# Altium PCB EDP_PCB.PcbDoc
Units mm, origin at the board's own origin, x right, y up, seen from the top; angles counter-clockwise.
Board outline 73 x 93 mm, 2 copper layers (Top Layer, Bottom Layer), stack 1.2 mm thick; 25 components, 26 nets, 96 pads, 7 vias.
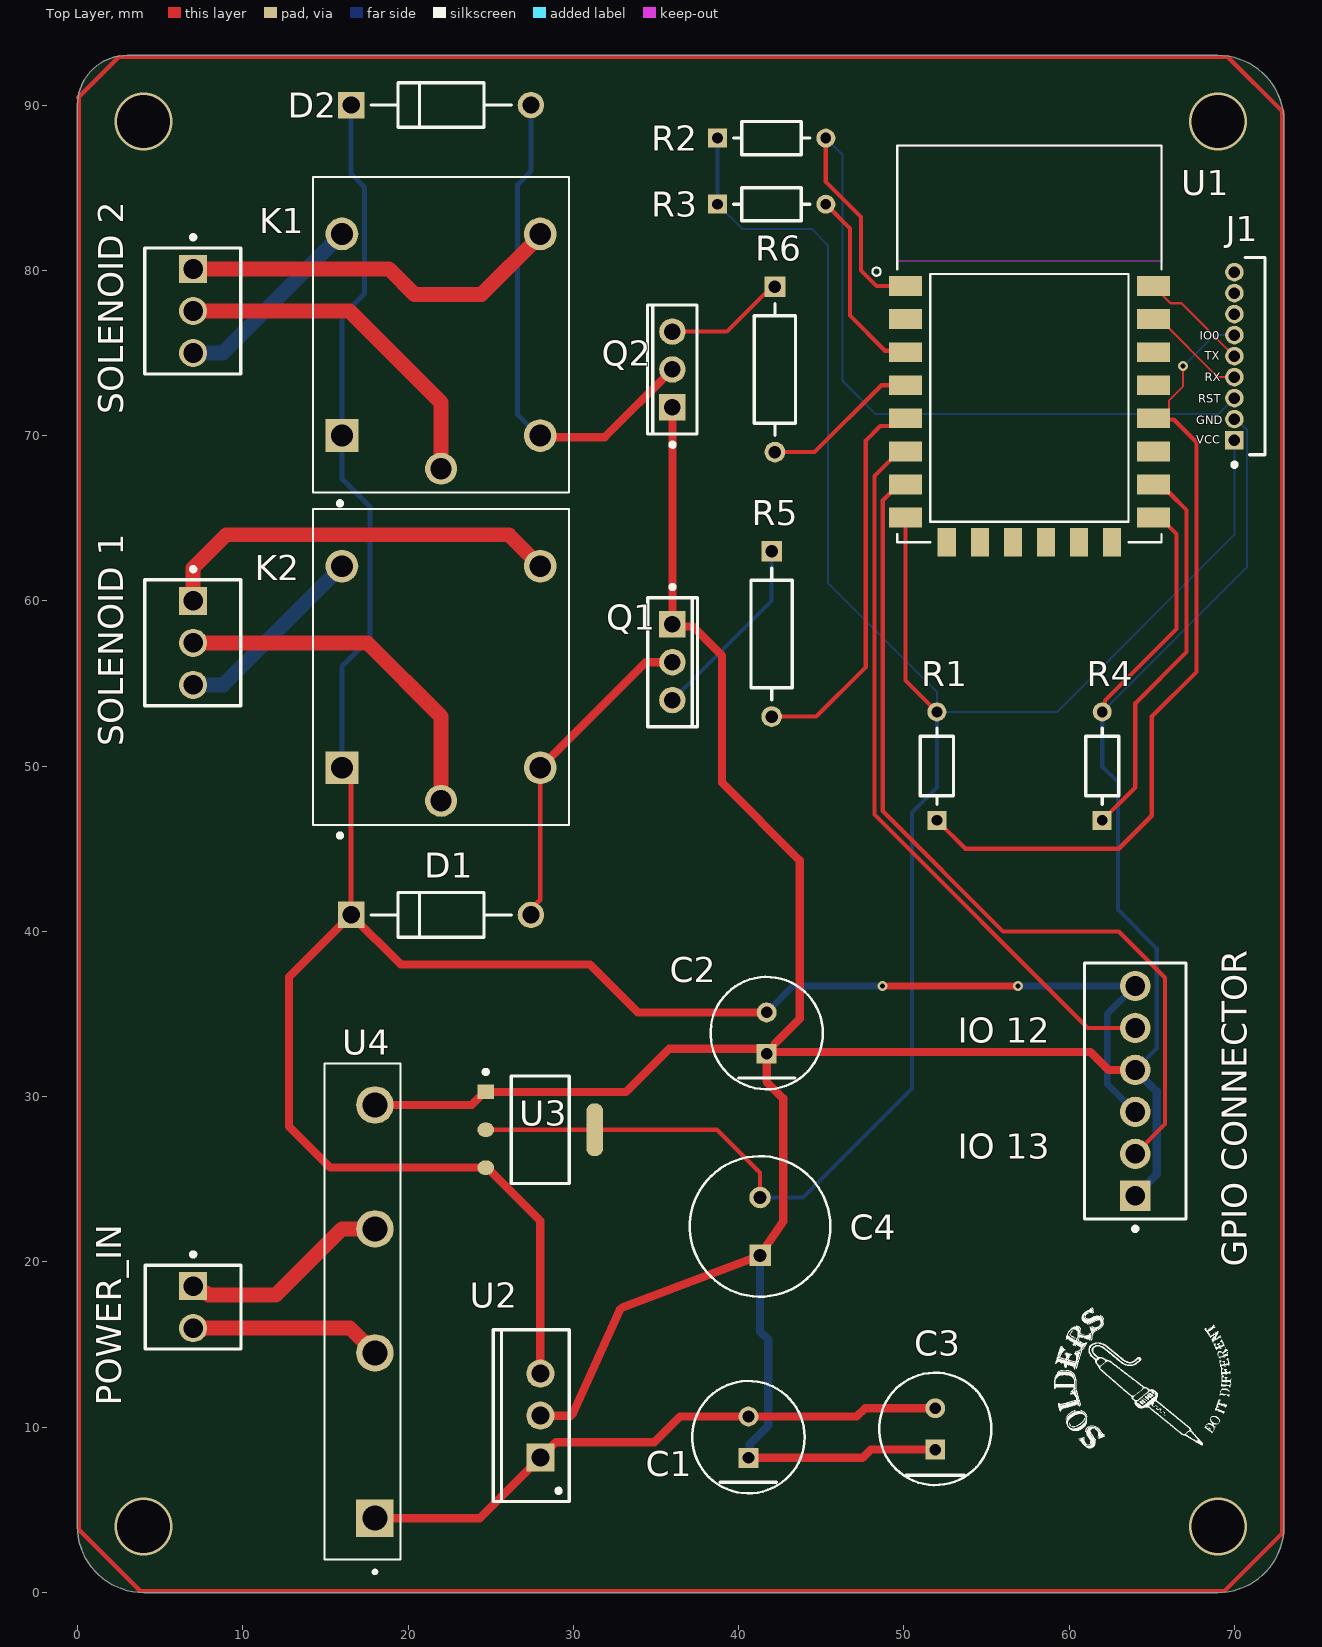
[diagram p0: Top Layer view]
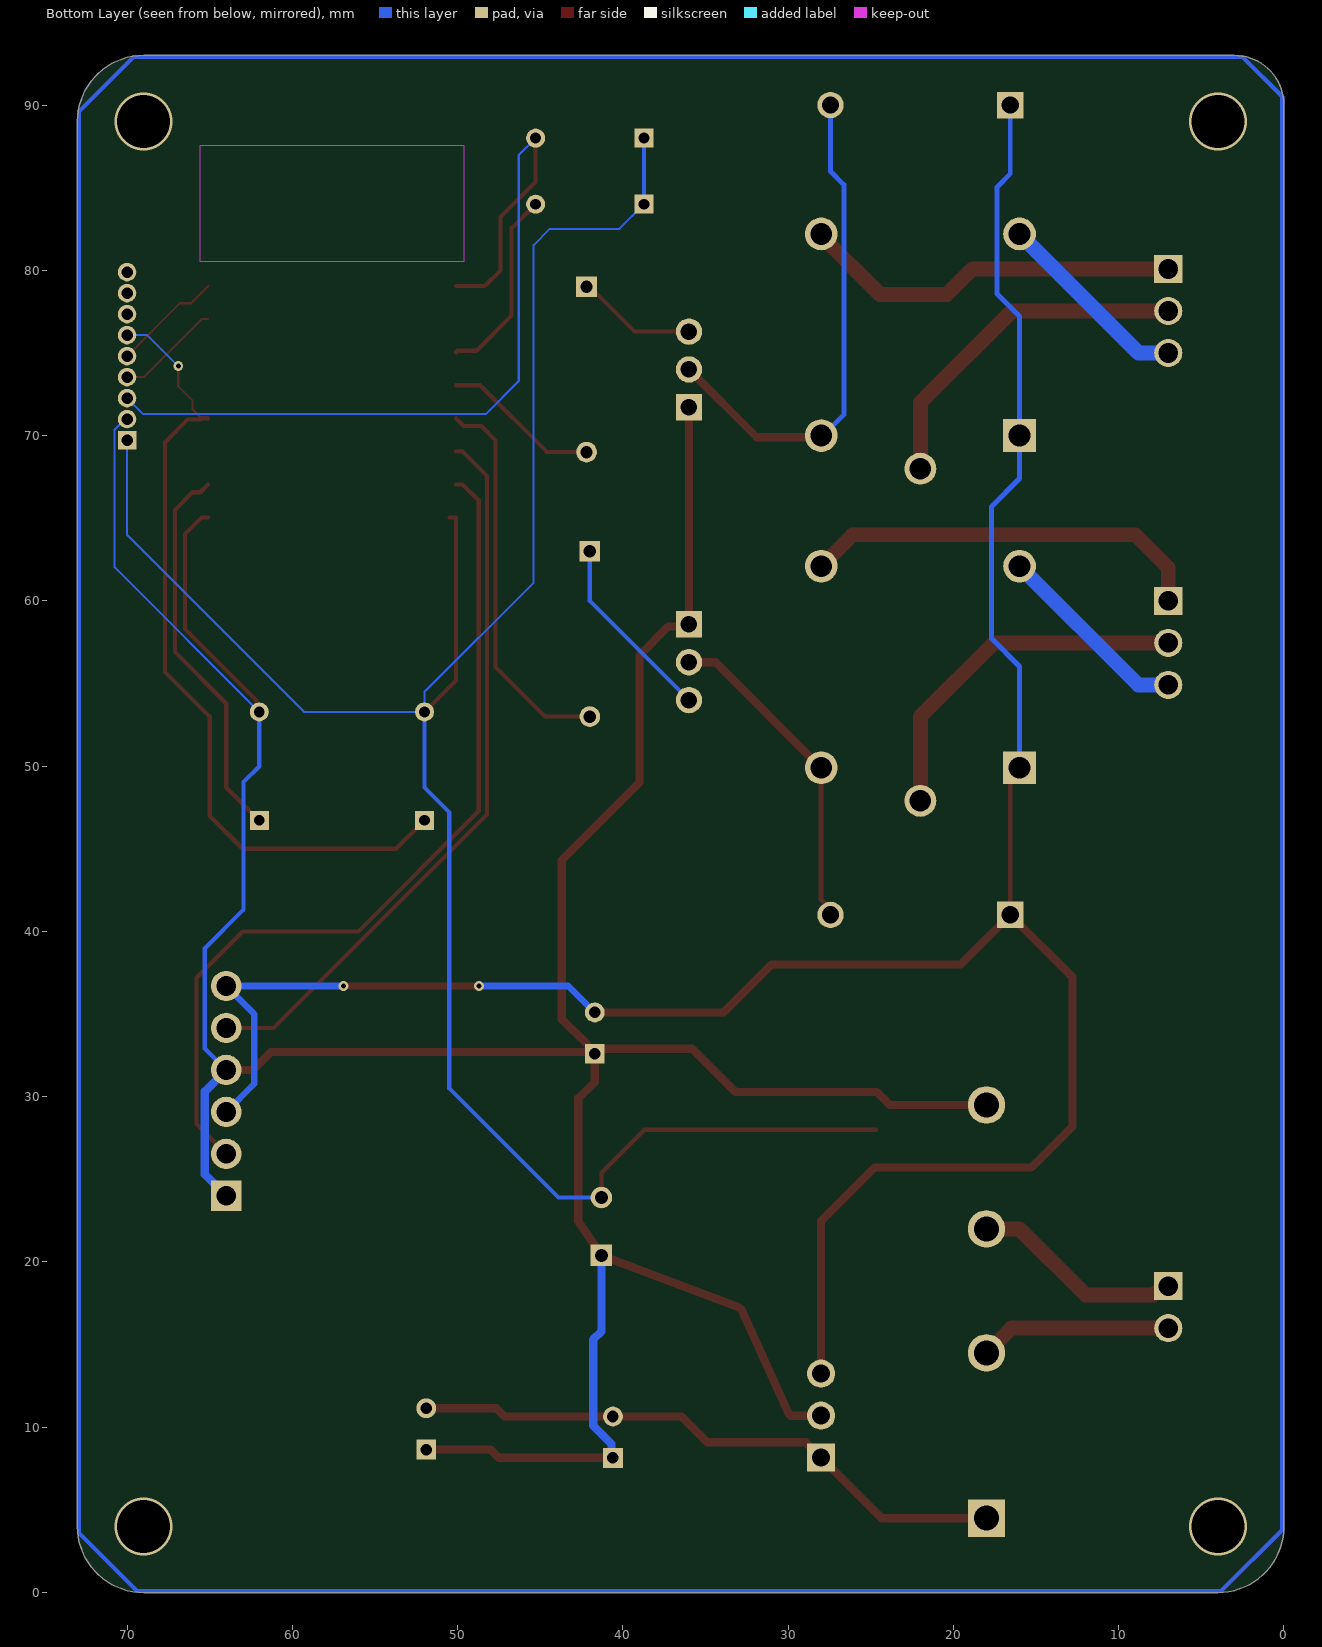
[diagram p1: Bottom Layer view, seen from below]
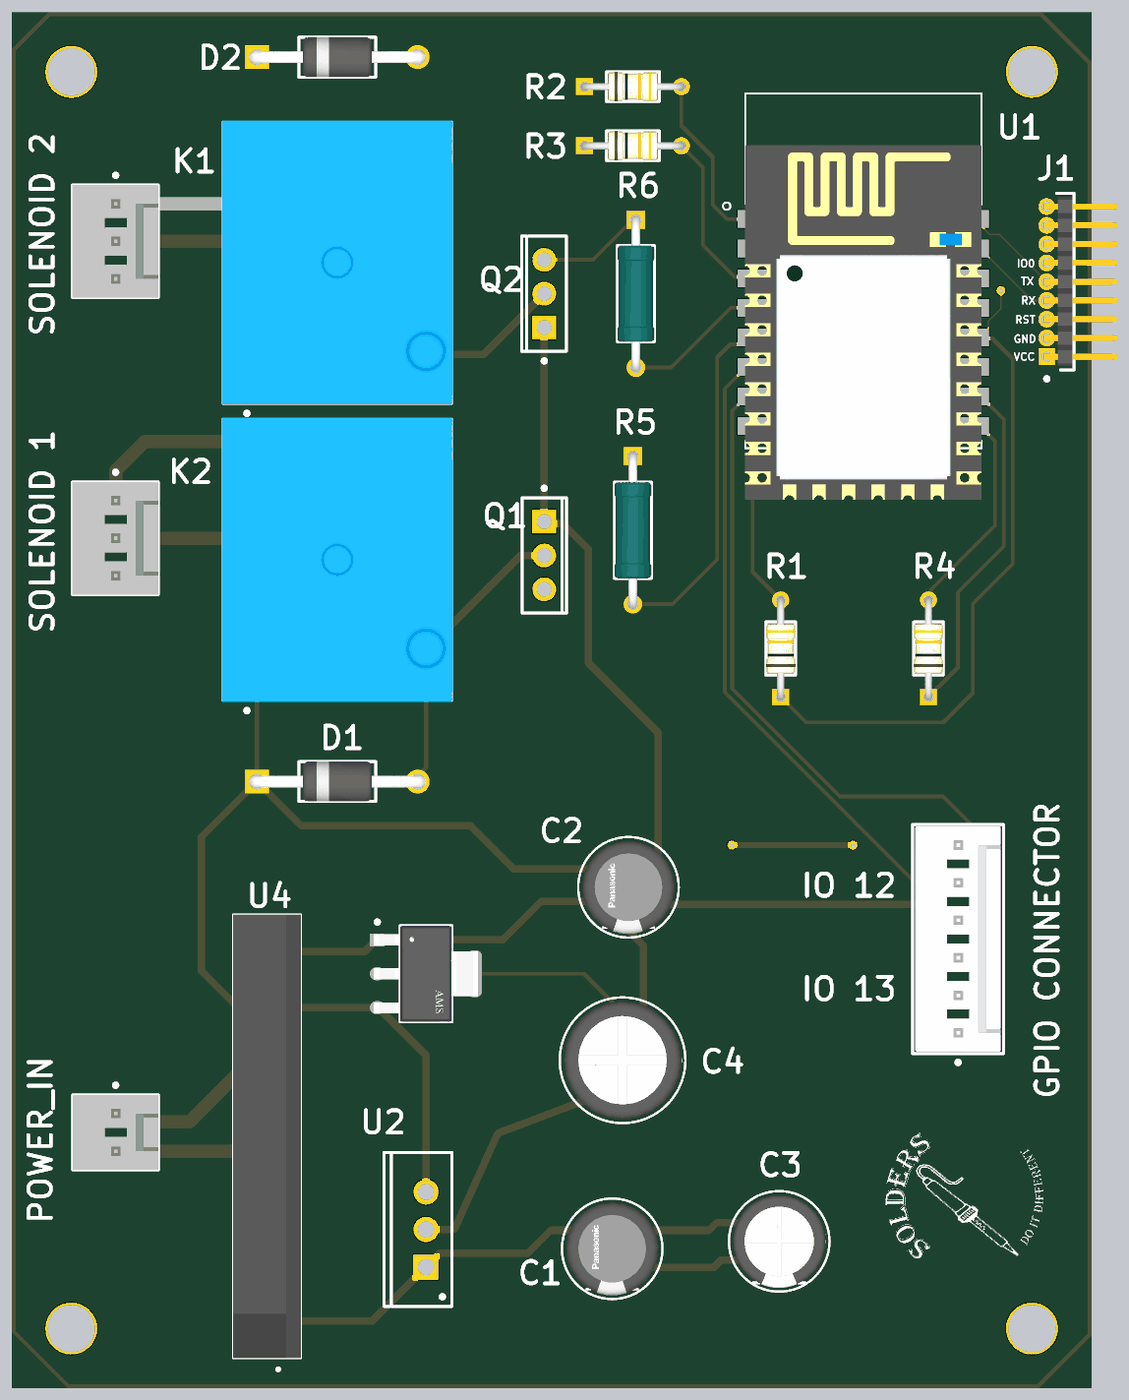
[diagram p2: 3D render of the assembled board from above, using the file's embedded part models]

## Layer stack, top to bottom
Top Solder: solder mask 0.05, SM-001, Dk 4
Top Layer: signal copper 0.1
Dielectric 1: dielectric 1, FR-4, Dk 4.8
Bottom Layer: signal copper 0.1
Bottom Solder: solder mask 0.05, SM-001, Dk 4

## Board outline
4,0 69,0 ccw(c69,4) 73,4 73,89 ccw(c69,89) 69,93 3,93 ccw(c3,90) 0,90 0,4 ccw(c4,4)

## Design rules (kind name [scope] priority, off if disabled: settings)
BoardOutlineClearance [All] p1: gap=0.2 ignorepadtopadclearanceinfootprint=FALSE
Clearance [All] p1: gap=0.127 ignorepadtopadclearanceinfootprint=FALSE except(0.25: Arc-Hole Track-Hole SMDPad-Hole THPad-Hole Via-Hole Fill-Hole Poly-Hole Region-Hole Text-Hole)
ComponentClearance [All] p1: gap=0.127 collisioncheckmode=3 verticalgap=0.127 showdistances=TRUE
DiffPairsRouting [All] p1: maxlimit=0.254 minlimit=0.127 mostfreqgap=0.127 toplayer_minwidth=0.127 toplayer_maxwidth=25.4 toplayer_prefwidth=0.127 bottomlayer_minwidth=0.127 bottomlayer_maxwidth=25.4 bottomlayer_prefwidth=0.127 maxuncoupledlength=12.7
Height [All] p1: minheight=0 maxheight=1816.048 prefheight=12.7
HoleSize [All] p1: absolutevalues=TRUE maxlimit=6.3 minlimit=0.3 maxpercent=80.000 minpercent=20.000
HoleToHoleClearance [All] p1: gap=0.25 allowstackedmicrovias=FALSE
MinimumAnnularRing [All] p1: minimumring=0.076
MinimumSolderMaskSliver [All] p1: minsoldermaskwidth=0
PlaneClearance [All] p1: clearance=0.127
PlaneConnect PlaneConnectPowerPads [InPadClass('PowerPads')] p1: planeconnectstyle=Direct reliefexpansion=0.508 reliefentries=4 reliefconductorwidth=0.254 reliefairgap=0.254
PlaneConnect [All] p2: pad.planeconnectstyle=Relief pad.reliefexpansion=0.3 pad.reliefentries=4 pad.reliefconductorwidth=0.127 pad.reliefairgap=0.127 via.planeconnectstyle=Direct via.reliefexpansion=0.3 via.reliefentries=4 via.reliefconductorwidth=0.127 via.reliefairgap=0.127
PolygonConnect PolygonConnectPowerPads [All vs (InPadClass('PowerPads'))] p1: connectstyle=Direct reliefconductorwidth=0.254 reliefentries=4 polygonreliefangle="90 Angle" airgapwidth=0.254
PolygonConnect [All] p2: thpad.connectstyle=Relief thpad.reliefconductorwidth=0.127 thpad.reliefentries=4 thpad.polygonreliefangle="90 Angle" thpad.airgapwidth=0.127 smdpad.connectstyle=Relief smdpad.reliefconductorwidth=0.127 smdpad.reliefentries=4 smdpad.polygonreliefangle="90 Angle" smdpad.airgapwidth=0.127 via.connectstyle=Direct via.reliefconductorwidth=0.127 via.reliefentries=4 via.polygonreliefangle="90 Angle" via.airgapwidth=0.127
RoutingVias [All] p1: holewidth=0.3 width=0.6 viastyle="Through Hole" minholewidth=0.3 minwidth=0.6 maxholewidth=0.6 maxwidth=6.6
SilkToSilkClearance [All] p1: silktosilkclearance=0
SilkToSolderMaskClearance [IsPad] p1: minsilkscreentomaskgap=0.127 clearancetoexposedcopper=TRUE
SolderMaskExpansion [All] p1: expansion=0.075 istentingtop=FALSE
Width [All] p1: maxlimit=25.4 minlimit=0.127 preferedwidth=0.127 minimp=50.000000 maximp=50.000000 favimp=50.000000
20 further rules are at their usual default settings.

## Components (designator, comment, footprint, x,y, rotation, side; value= is the part's Value field where it differs from the comment)
C1 "ECE-A1HN100U" FP-ECE-A1HN100U-MFG 40.6,9.4 r90 top
C2 "ECE-A1HN100U" FP-ECE-A1HN100U-MFG 41.7,33.85 r90 top
C3 "EEUFR1H470" FP-RAD-TH-D_6_3_0_5-L_11-MFG 51.9,9.9 r90 top
C4 "ECA1HEN220" FP-RAD-TH-D_8_0_5-L_11_5-MFG 41.3,22.15 r90 top
D1 "1N4007-E3/54" FP-1N4007-MFG 22,41 r0 top value=15pF
D2 "1N4007-E3/54" FP-1N4007-MFG 22,90 r0 top value=15pF
"GPIO CONNECTOR" "22-27-2061" FP-22-27-2061-MFG 64,30.35 r90 top
J1 "GRPB091VWCN-RC" FP-GRPB091VWCN-RC-MFG 71.257,74.81 r90 top
K1 "SRD-05VDC-SL-C" RELAY_SRD-05VDC-SL-C 22,76.1 r90 top
K2 "SRD-05VDC-SL-C" RELAY_SRD-05VDC-SL-C 22,56 r90 top
POWER_IN "22-27-2021" MOLX-22-27-2021_V 7,17.27 r270 top
Q1 "BD139G" ONSC-TO-225-3-77-09 36,56.29 r0 top
Q2 "BD139G" ONSC-TO-225-3-77-09 36,74 r180 top
R1 "CF18JT10K0" FP-CF18-MFG 52,50 r90 top value=10kΩ
R2 "CF18JT10K0" FP-CF18-MFG 42,88 r0 top value=10kΩ
R3 "CF18JT10K0" FP-CF18-MFG 42,84 r0 top value=10kΩ
R4 "CF18JT10K0" FP-CF18-MFG 62,50 r90 top value=10kΩ
R5 "MRS25000C1001FCT00" FP-MRS25-MFG 42,58 r270 top
R6 "MRS25000C1001FCT00" FP-MRS25-MFG 42.2,74 r270 top
"SOLENOID 1" "22-27-2031" MOLX-22-27-2031_V 7,57.46 r270 top
"SOLENOID 2" "22-27-2031" MOLX-22-27-2031_V 7,77.54 r270 top
U1 "ESP8266-12E/ESP-12E" XCVR_ESP8266-12E/ESP-12E 57.598,72.045 r0 top
U2 "L7805CV" TO220 28.007,10.704 r90 top
U3 "AMS1117-3.3" FP-AMS1117-IPC_C 28,28 r0 top
U4 "S1VBA60-7000" DIOB_LL15XB60-7000 18,17 r90 top

## Footprints (in the part's own frame and the unit in brackets; to place one, negate y for a bottom-side part, rotate by r counter-clockwise, add the part's x,y. Pads: shape width x height; smd on the part's side, far side on the other; paste and mask are expansions set on the pad)
DIOB_LL15XB60-7000 [mm]
  rect 2.265x2.265 / inner round 2.265 / far side rect 2.265x2.265 hole 1.51: 1(-12.5,0)
  round 2.265 hole 1.51: 2(-2.5,0) 3(5,0) 4(12.5,0)
  silkscreen extent -15.85,-1.55 15,3.05, body extent -15,-1.55 15,3.05, height 24.5
FP-1N4007-MFG [mm]
  rect 1.6x1.6 hole 1.05 paste-1000 mask+0: 1(-5.438,0)
  round 1.6 hole 1.05 paste-1000 mask+0: 2(5.438,0)
  silkscreen extent -4.24,-1.35 4.24,1.35, body extent -5.96,-1.35 5.96,1.35, height 2.7
FP-22-27-2061-MFG [mm]
  rect 1.84x1.84 hole 1.19 paste-1000 mask+0: 1(-6.35,0)
  round 1.84 hole 1.19 paste-1000 mask+0: 2(-3.81,0) 3(-1.27,0) 4(1.27,0) 5(3.81,0) 6(6.35,0)
  silkscreen extent -8.47,-3.08 7.75,3.08, body extent -7.85,-3.18 7.85,3.17, height 0.25
FP-AMS1117-IPC_C [mm]
  rect 1.004x0.872 smd paste+0 mask+0: 1(-3.295,2.29)
  rrect100% 1.004x0.872 smd paste+0 mask+0: 2(-3.295,0) 3(-3.295,-2.29)
  rrect87% 1.004x3.182 smd paste+0 mask+0: 4(3.295,0)
  silkscreen extent -3.42,-3.25 1.75,3.62, body extent -3.9,-3.35 3.9,3.35, height 0.25
FP-CF18-MFG [mm]
  rect 1.15x1.15 hole 0.65 paste-1000 mask+0: 1(-3.28,0)
  round 1.15 hole 0.65 paste-1000 mask+0: 2(3.28,0)
  silkscreen extent -2.3,-1 2.3,1, body extent -3.96,-1.1 3.96,1.1, height 0.25
FP-ECE-A1HN100U-MFG [mm]
  rect 1.2x1.2 hole 0.7 paste-1000 mask+0: 1(-1.25,0)
  round 1.2 hole 0.7 paste-1000 mask+0: 2(1.25,0)
  silkscreen extent -3.4,-3.4 3.4,3.4, body extent -3.5,-3.5 3.5,3.5, height 0.25
FP-GRPB091VWCN-RC-MFG [mm]
  rect 1.12x1.12 hole 0.7 paste-1000 mask+0: 1(-5.08,1.257)
  round 1.12 hole 0.7 paste-1000 mask+0: 2(-3.81,1.257) 3(-2.54,1.257) 4(-1.27,1.257) 5(0,1.257) 6(1.27,1.257) 7(2.54,1.257) 8(3.81,1.257) 9(5.08,1.257)
  silkscreen extent -6.69,-0.6 5.97,1.38, body extent -6.07,-3.9 6.07,1.92, height 0.25
FP-MRS25-MFG [mm]
  rect 1.25x1.25 hole 0.75 paste-1000 mask+0: 1(-5,0)
  round 1.25 hole 0.75 paste-1000 mask+0: 2(5,0)
  silkscreen extent -3.98,-1.25 3.98,1.25, body extent -5.72,-1.35 5.72,1.35, height 0.25
FP-RAD-TH-D_6_3_0_5-L_11-MFG [mm]
  rect 1.2x1.2 hole 0.7 paste-1000 mask+0: 1(-1.25,0)
  round 1.2 hole 0.7 paste-1000 mask+0: 2(1.25,0)
  silkscreen extent -3.4,-3.4 3.4,3.4, body extent -3.5,-3.5 3.5,3.5, height 0.25
FP-RAD-TH-D_8_0_5-L_11_5-MFG [mm]
  rect 1.3x1.3 hole 0.8 paste-1000 mask+0: 1(-1.75,0)
  round 1.3 hole 0.8 paste-1000 mask+0: 2(1.75,0)
  silkscreen extent -4.25,-4.25 4.25,4.25, body extent -4.35,-4.35 4.35,4.35, height 0.25
MOLX-22-27-2021_V [mm] "Header, 2-Leads, Body 5.8x5.08mm"
  rect 1.7x1.7 hole 1.19: 1(-1.27,0)
  round 1.7 hole 1.19: 2(1.27,0)
  silkscreen extent -3.31,-2.9 2.54,2.9, body extent -2.54,-2.9 2.54,2.9, height 11.72
MOLX-22-27-2031_V [mm] "Header, 3-Leads, Body 7.62x5.8mm, Pitch 2.54mm"
  rect 1.7x1.7 hole 1.19 paste+0: 1(-2.54,0)
  round 1.7 hole 1.19 paste+0: 2(0,0) 3(2.54,0)
  silkscreen extent -4.58,-2.92 3.81,2.88, body extent -3.81,-2.92 3.81,2.88, height 11.71
ONSC-TO-225-3-77-09 [mm] "FM, 3-Leads, Body 7.8x3mm, Pitch 2.29mm"
  rect 1.6x1.6 hole 1: 1(0,2.29)
  round 1.6 hole 1: 2(0,0) 3(0,-2.29)
  silkscreen extent -1.49,-3.9 1.51,4.67, body extent -1.49,-3.9 1.51,3.9, height 13.64
RELAY_SRD-05VDC-SL-C [mm]
  rect 1.98x1.98 / inner round 1.98 / far side rect 1.98x1.98 hole 1.32: A1(-6.1,6)
  round 1.98 hole 1.32: A2(-6.1,-6) NC(6.1,6) NO(6.1,-6)
  round 1.935 hole 1.29: COM(-8.1,0)
  silkscreen extent -10.3,-7.75 9.55,7.75, body extent -9.6,-7.8 9.6,7.8, height 15.8
TO220 [mm] "TO, Thru-Hole, Vertical, Heatsink Mounted; 3 In-Line Leads; Pitch 2.54 mm"
  rect 1.7x1.7 hole 1.1: 1(-2.54,0)
  round 1.7 hole 1.1: 2(0,0) 3(2.54,0)
  silkscreen extent -5.2,-1.75 5.2,2.85, body extent -5.25,-1.8 5.25,2.9, height 19.7
XCVR_ESP8266-12E/ESP-12E [mm]
  rect 2x1.2 smd: 1(-7.5,7) 2(-7.5,5) 3(-7.5,3) 4(-7.5,1) 5(-7.5,-1) 6(-7.5,-3) 7(-7.5,-5) 8(-7.5,-7) 15(7.5,-7) 16(7.5,-5) 17(7.5,-3) 18(7.5,-1) 19(7.5,1) 20(7.5,3) 21(7.5,5) 22(7.5,7)
  rect 1.1x1.7 smd: 9(-5,-8.5) 10(-3,-8.5) 11(-1,-8.5) 12(1,-8.5) 13(3,-8.5) 14(5,-8.5)
  Keep-Out Layer region: 8,8.51 -8.009,8.51 -8.009,15.5 8,15.5
  Keep-Out Layer region: 8,8.51 -8.009,8.51 -8.009,15.5 8,15.5
  silkscreen extent -9.5,-8.5 8,15.5, body extent -8,-12 8,12, height 3

## Part data
C1 C2: library part CMP-05427-000036-1, "CAP ALUM 10UF 20% 50V RADIAL", Capacitance=10uF, Case/Package=Radial, Dielectric Material=Aluminium, Leakage Current=4.5uA, Max Operating Temperature=85°C, Min Operating Temperature=-40°C, Package Quantity=200, Ripple Current=50mA, Tolerance=20%, Voltage=50V, Construction=RADIAL, Contact Plating=Tin, Diameter=6.3mm, Dissipation Factor=0.15%, Height=11.2mm, Height - Seated (Max)=0.441inch, Lead Diameter=0.5mm, Lead Free="Lead Free", Lead Pitch=2.5mm, Length=11.2mm, Life (Hours)=2000Hour, Mount="Through Hole", Number of Pins=2, Packaging=Bulk, Polarity=Bipolar, Radiation Hardening=No, REACH SVHC="No SVHC", Ripple Current (AC)=50mA, RoHS Compliant=Yes, Series=SU, Termination=Radial, Voltage Rating=50V, Voltage Rating (DC)=50V
C3: library part CMP-05427-001321-1, "Aluminum Electrolytic Capacitors (Radial Lead Type) 47uF ±20% 50V", Capacitance=47uF, Case/Package=Radial, Max Operating Temperature=105°C, Min Operating Temperature=-40°C, Ripple Current=405mA, Tolerance=20%, Voltage=50V, Construction=RADIAL, Diameter=6.3mm, Height=11.2mm, Impedance=140mR, Lead Diameter=0.5mm, Lead Pitch=2.5mm, Life (Hours)=5000Hour, Packaging=Bulk, REACH SVHC=Yes, Ripple Current (AC)=405mA, RoHS Compliant=Yes, Series="FR Radial", Termination=Radial, Voltage Rating=50V
C4: library part CMP-05427-001829-1, "Aluminum Electrolytic Capacitors (Radial Lead Type) 22uF ±20% 50V", Capacitance=22uF, Case/Package=Radial, Max Operating Temperature=105°C, Min Operating Temperature=-40°C, Package Quantity=200, Ripple Current=90mA, Tolerance=20%, Voltage Rating (DC)=50V, Lead Pitch=3.5mm, Lead/Base Style=Straight, Mount="Through Hole", Packaging=Bulk, Series=GA, Termination=Radial
D1 D2: library part CMP-02540-000046-1, "DIODE GEN PURP 1KV 1A DO204AL", Capacitance=15pF, Forward Current=1A, Manufacturer=Vishay, Max Junction Temp=+150°C, Max Repetitive Reverse Voltage=1000V, Max Surge Forward Current=30A, Package=1N4007, Peak Reverse Current=30uA, Temperature="-50°C to +150°C", Temperature Range Low=-50°C, Automotive=No, Category=Diode, ComponentLink2Description=Datasheet, ComponentLink2URL=http://www.vishay.com/docs/88503/1n4001.pdf, Device Class L1="Discrete Semiconductors", Device Class L2=Diodes, Device Class L3="Rectifier Diodes", Digikey Description="DIODE GEN PURP 1KV 1A DO204AL", Height=2.7mm, Ipc Land Pattern Name=DIOPA1088W105L520D270, Lead Free=Yes, Manufacturer Part Number=1N4007-E3/54, Mouser Description="Rectifiers Vr/1000V Io/1A", Octopart=https://octopart.com/1n4007-e3%2F54-vishay-39548207, RoHS=TRUE, Temperature Range High=+150°C
"GPIO CONNECTOR": library part CMP-04776-000309-1, "CONN HEADER VERT 6POS 2.54MM", Color=Natural, Contact Resistance=10mR, Current Rating=4A, Flammability Rating="UL94 V-0", Housing Color=White, Max Operating Temperature=75°C, Max Voltage Rating (AC)=250V, Min Operating Temperature=0°C, Package Quantity=10000, Connector Type="Male Pin", Contact Material=Brass, Contact Mating Length=0.295inch, Contact Plating=Tin, Contact Type="Male Pin", Depth=5.8mm, Fastening Type=Friction, Gender=Male, Hole Diameter=1.02mm, Housing Material=Nylon, Lead Pitch=2.54mm, Length=15.24mm, Material=Nylon, Max Current Rating=4A, Mount="Through Hole", Number of Contacts=6, Number of Positions=6, Number of Rows=1, Orientation=Straight, Packaging=Bulk, Pitch=2.54mm, Radiation Hardening=No, REACH SVHC="No SVHC", Series=KK, Termination=Solder, Voltage Rating=250V, Voltage Rating (AC)=250V, Working Voltage=250V
J1: library part CMP-25680-000033-1, "CONN HEADER R/A 9POS 1.27MM", Package Quantity=1, Connector Type="Male Pin", Contact Mating Length=0.118inch, Contact Plating=Gold, Contact Type="Male Pin", Lead Free="Lead Free", Mount="Through Hole", Number of Positions=9, Number of Rows=1, Packaging=Bulk, Pitch=0.05inch, Termination=Solder
K1 K2: "5V Trigger Relay Module For Arduino And Raspberry Pi 5V Trigger Relay Module For Arduino And Raspberry Pi", Package="NON STANDARD-5 Songle Relay", Availability="Not in stock", Check_prices=https://www.snapeda.com/parts/SRD-05VDC-SL-C/Songle+Relay/view-part/?ref=eda, MF="Songle Relay", MP=SRD-05VDC-SL-C, Price=None, SnapEDA_Link=https://www.snapeda.com/parts/SRD-05VDC-SL-C/Songle+Relay/view-part/?ref=snap
POWER_IN: library part CMP-2000-05537-1, "Male Header, Pitch 2.54 mm, 1 x 2 Position, Height 11.7 mm, Tail Length 3.56 mm, 0 to 75 degC, RoHS, Bulk", Current - Max=4A, Manufacturer=Molex, Operating temperature=0°Cto+75°C, Package Description="2-Leads Header, Body 5.08 x 5.8 mm, Pitch 2.54 mm", Package Version="Rev. BC, 02/2012", PartNumber=0022272021, Voltage - Max=250V, Contact Material=Tinplatedbrass, Current Rating=4A, Datasheet URL=http://www.molex.com/pdm_docs/sd/022272021_sd.pdf, Datasheet Version="Rev. F, 06/2009", Housing Material=Nylon(UL94V-0), Manufacturer URL=http://www.molex.com/, Mounting Technology=ThroughHole, No. of Positions=2, No. of Rows=1, Orientation=Vertical, Package Reference=22-27-2021, Pitch=2.54mm, Voltage Rating=250V
Q1 Q2: library part CMP-1048-01269-1, "Plastic Medium-Power Silicon NPN Transistor, 3-Pin TO-225, Pb-Free, Bulk Box", Manufacturer="On Semiconductor", ComponentLink1Description="Manufacturer URL", ComponentLink1URL=http://www.onsemi.com/, ComponentLink2Description=Datasheet, ComponentLink2URL=http://www.onsemi.com/pub_link/Collateral/BD135-D.PDF, ComponentLink3Description="Package Specification", ComponentLink3URL=http://www.onsemi.com/pub_link/Collateral/77-09.PDF, DatasheetVersion="Rev. 16", IC Continuous (A)=1.5, Mounting Technology="Through Hole", PackageDescription="3-Pin Flange Mount, Vertical Straight Lead, Body 7.6 x 2.7 mm, Pitch 2.29 mm", PackageReference=TO-225-3-77-09, PackageVersion="Rev. AC, 12/2013", Packing="Bulk Box", PartNumber=BD139G, Polarity=NPN, RoHS=TRUE
R1 R2 R3 R4: library part CMP-26528-000002-1, "RES 10K OHM 1/8W 5% CF AXIAL", Manufacturer="Stackpole Electronics", Package=CF18, Power Rating=0.125W, Resistance=10kΩ, Temperature="-55°C to +155°C", Temperature Coefficient=0-500ppm/°C, Temperature Range High=+155°C, Temperature Range Low=-55°C, Tolerance=5%, Voltage Rating=250V, Automotive=No, Category=Res, ComponentLink2Description=Datasheet, ComponentLink2URL=http://www.seielect.com/Catalog/SEI-CF_CFM.pdf, Composition="Carbon Film", Device Class L1="Passive Components", Device Class L2=Resistors, Device Class L3="Through-Hole Resistors", Digikey Description="RES 10K OHM 1/8W 5% CF AXIAL", Height=2mm, Ipc Land Pattern Name=RESAD656W65L360D200, Lead Free=Yes, Manufacturer Part Number=CF18JT10K0, Octopart=https://octopart.com/cf18jt10k0-stackpole+electronics-19205642, RoHS=TRUE, Series=CF
R5 R6: library part CMP-02408-000051-1, "RES 1K OHM 0.6W 1% AXIAL", Case/Package=Axial, Max Operating Temperature=155°C, Max Power Dissipation=600mW, Min Operating Temperature=-55°C, Package Quantity=5000, Resistance=1kR, Resistance Tolerance=1%, Resistor Type="Metal Film", Temperature Coefficient=50ppm/°C, Voltage Rating=350V, Construction=Cylindrical, Contact Plating=Tin, Diameter=2.5mm, Lead Diameter=0.6mm, Lead Free="Lead Free", Length=6.5mm, Military Standard=Not, Mount="Through Hole", Number of Pins=2, Number of Terminations=2, Packaging="Tape and Reel", Power Rating=600mW, Radiation Hardening=No, RoHS Compliant=Yes, Series=MRS25, Technology="THIN FILM", Termination=Axial, Tolerance=1%, Voltage Rating (DC)=350V, Weight=0.00776oz, Width=2.5mm
"SOLENOID 1" "SOLENOID 2": library part CMP-2000-05538-1, "Male Header, Pitch 2.54 mm, 1 x 3 Position, Height 11.7 mm, Tail Length 3.56 mm, -40 to 80 degC, RoHS, Bulk", Current Rating=4A, Manufacturer=Molex, Operating temperature=0°Cto+75°C, Package Description="Male Header, Pitch 2.54 mm, 1 x 3 Position, Height 11.7 mm, Tail Length 3.56 mm", Voltage Rating=250V, Contact Material=Tinplatedbrass, Datasheet URL=http://www.molex.com/webdocs/datasheets/pdf/en-us/0022272031_PCB_HEADERS.pdf, Datasheet Version=06/2016, Housing Material=Nylon(UL94V-0), Manufacturer URL=http://www.molex.com/, Mounting Technology=ThroughHole, Package Reference=22-27-2031, Package URL=http://www.molex.com/pdm_docs/sd/022272031_sd.pdf
U1: "This WiFi module has a 32-bit MCU micro and clock speeds supporting 80 MHz or 160 MHz. Supports the RTOS and integrated Wi-Fi MAC/BB/RF/PA/LNA, and has an on-board antenna.", Package=None, Availability="Not in stock", Check_prices=https://www.snapeda.com/parts/ESP8266-12E/ESP-12E/AI-Thinker/view-part/?ref=eda, MF=AI-Thinker, MP=ESP8266-12E/ESP-12E, Price=None, SnapEDA_Link=https://www.snapeda.com/parts/ESP8266-12E/ESP-12E/AI-Thinker/view-part/?ref=snap
U2: library part CMP-0244-00483-1, "Positive Voltage Regulator, 5V, 3-Pin TO-220", ComponentLink1Description="Manufacturer URL", ComponentLink1URL=http://www.st.com, ComponentLink2Description=Datasheet, ComponentLink2URL=http://www.st.com/internet/com/TECHNICAL_RESOURCES/TECHNICAL_LITERATURE/DATASHEET/CD00000444.pdf, ComponentLink3Description="Package Specification", ComponentLink3URL=http://www.st.com/internet/com/TECHNICAL_RESOURCES/TECHNICAL_LITERATURE/PACKAGE_INFORMATION/CD00004649.pdf, DatasheetVersion=16/11/2011, PackageDescription="TO, Thru-Hole, Vertical, Heatsink Mounted; 3 In-Line Leads; Pitch 2.54 mm", PackageReference=TO220, PackageVersion=ver3.0
U3: library part CMP-209535-000001-1, "LDO Voltage Regulators 1A, 3.3V", Dropout Voltage=1.1V, Manufacturer="Advanced Monolithic Systems", Max Junction Temp=+125°C, Max Power Dissipation=1.2W, Max Supply Voltage=15V, Nominal Supply Current=5mA, Output Current=1A, Output Voltage=3.3V, Package=AMS1117, Temperature="-40°C to +125°C", Temperature Range Low=-40°C, Automotive=No, Category=IC, ComponentLink2Description=Datasheet, ComponentLink2URL=http://www.advanced-monolithic.com/pdf/ds1117.pdf, Device Class L1="Integrated Circuits (ICs)", Device Class L2="Power Management ICs", Device Class L3="Voltage Regulators - Linear", Height=1.8mm, Ipc Land Pattern Name=SOT229P700X180-4, Lead Free=Yes, Manufacturer Part Number=AMS1117-3.3, Number Of Outputs=1, Octopart=https://octopart.com/ams1117-3.3-advanced+monolithic+systems-25899300, Output Type=Fixed, RoHS=TRUE, Standoff Height=0.64mm, Temperature Range High=+125°C
U4: "1 IO, 600 VRM, 700 VRSM, THD Bridge Diode, 1V Package Type", Package="SIP-4 Shindengen", Availability="In Stock", Check_prices=https://www.snapeda.com/parts/S1VBA60-7000/Shindengen/view-part/?ref=eda, MF=Shindengen, MP=S1VBA60-7000, Price=None, SnapEDA_Link=https://www.snapeda.com/parts/S1VBA60-7000/Shindengen/view-part/?ref=snap

## Via types
v1: diameter 3.5, hole 3.2, Top Layer to Bottom Layer, 4 vias
v2: diameter 0.6, hole 0.3, Top Layer to Bottom Layer, 3 vias

## Nets (pads, with @x,y where several pads share a name; then routed paths per layer and width w, separated by ;. In a path a pad name is that pad's centre, name@x,y a point inside that pad or via, vN(x,y) a via of type N, cw(c..) or ccw(c..) an arc to the next point about the centre after c; other vN are vias at no path point)
GND: "GPIO CONNECTOR.1" "GPIO CONNECTOR.4" C1.1 C2.1 C3.1 C4.1 J1.2 Q1.1 Q2.1 R4.2 U1.15 U2.2 U3.1 U4.4 | length 216.2
  Top Layer w0.254: U3.1@24.639,30.29 U3.1 ; 29.862,10.704 29.937,10.778 29.97,10.811 ; 32.836,17.158 32.907,17.229 32.958,17.249 ; C4.1 41.667,20.923 C4.1@41.667,20.938 ; C2.1@41.4,32.9 C2.1 ; C2.1@41.7,32.705 41.805,32.705 42.173,33.073 C2.1@42.173,33.178 ; 42.656,22.388 42.7,22.453 ; R4.2 62.162,53.442 62.162,53.962 66.5,58.3 66.5,64.043 65.498,65.045 U1.15
  Top Layer w0.5: U4.4 23.849,29.5 U3.1@24.639,30.29 ; U3.1 33.19,30.29 35.8,32.9 C2.1@41.4,32.9 ; U2.2 29.862,10.704 ; 29.97,10.811 32.836,17.158 ; 32.958,17.249 C4.1 ; Q2.1 Q1.1 36.137,58.443 37.257,58.443 39,56.7 39,49 43.7,44.3 43.7,34.705 C2.1@42.173,33.178 ; C1.1 47.5,8.15 48,8.65 C3.1 ; C4.1@41.667,20.938 42.656,22.388 ; C2.1 41.7,30.9 42.7,29.9 42.7,22.453 ; C2.1@41.805,32.705 61.295,32.705 62.38,31.62 64,31.62
  Bottom Layer w0.127: R4.2 70.751,62.031 70.751,70.369 70.119,71 J1.2
  Bottom Layer w0.254: C1.1 40.682,8.232 C1.1@41.073,8.623 ; R4.2 62,49.989 62.952,49.037 62.952,41.316 65.297,38.971 65.297,32.917 64,31.62
  Bottom Layer w0.5: C1.1@40.682,8.232 40.682,8.982 41.8,10.1 41.8,15.3 41.3,15.8 C4.1 ; 64,24 65.297,25.297 65.297,30.323 64,31.62
NetC1_2: C1.2 C3.2 U2.1 U4.1 | length 36.7
  Top Layer w0.5: U4.1 24.343,4.5 28.943,9.1 34.9,9.1 36.45,10.65 47.15,10.65 47.65,11.15 C3.2
NetC2_2: "GPIO CONNECTOR.3" "GPIO CONNECTOR.6" C2.2 D1.1 D2.1 K1.A1 K2.A1 U2.3 U3.3 | length 152.3
  Top Layer w0.254: K2.A1 K2.A1@16.562,49.338 ; U3.3 U3.3@24.771,25.71
  Top Layer w0.3: D1.1 K2.A1@16.562,49.338
  Top Layer w0.4: v2(48.7,36.7) v2(56.9,36.7)
  Top Layer w0.5: U3.3 15.29,25.71 12.8,28.2 12.8,37.238 D1.1 19.562,38 31.005,38 33.905,35.1 C2.2 ; U3.3@24.771,25.71 28.007,22.474 U2.3
  Bottom Layer w0.3: K2.A1 16,56.031 17.7,57.731 17.7,65.7 16,67.4 K1.A1 16,77.212 17.367,78.579 17.367,85.028 16.562,85.833 D2.1
  Bottom Layer w0.4: C2.2 43.3,36.7 v2(48.7,36.7) ; v2(56.9,36.7) 64,36.7 62.3,35 62.3,30.78 64,29.08
NetC4_2: C4.2 J1.1 R1.2 R2.1 R3.1 U1.8 U3.2 U3.4 | length 138.3
  Top Layer w0.254: U3.2 U3.4 38.7,28 41.3,25.4 C4.2 ; U1.8@50.498,65.045 U1.8 50.098,55.182 R1.2
  Bottom Layer w0.127: R3.1 40.213,82.507 44.419,82.507 45.4,81.526 45.4,61.1 52,54.5 R1.2 59.28,53.28 70,64 J1.1
  Bottom Layer w0.254: R3.1 R2.1 ; C4.2 43.9,23.9 50.5,30.5 50.5,47.2 52,48.7 R1.2
NetD1_2: D1.2 K2.A2 Q1.2 | length 19.8
  Top Layer w0.254: D1.2 D1.2@27.438,41.364
  Top Layer w0.3: D1.2@27.438,41.364 28,41.926 K2.A2
  Top Layer w0.5: K2.A2 34.39,56.29 Q1.2
NetD2_2: D2.2 K1.A2 Q2.2 | length 30.7
  Top Layer w0.5: K1.A2@28,69.9 31.9,69.9 Q2.2
  Bottom Layer w0.3: D2.2 27.438,85.987 26.633,85.182 26.633,71.267 K1.A2@28,69.9
"NetGPIO CONNECTOR_2": "GPIO CONNECTOR.2" U1.7 | length 53.2
  Top Layer w0.254: U1.7 49.698,67.045 48.721,66.068 48.721,47.279 56,40 63,40 65.8,37.2 65.8,28.34 64,26.54
"NetGPIO CONNECTOR_5": "GPIO CONNECTOR.5" U1.6 | length 44.1
  Top Layer w0.254: U1.6 49.698,69.045 48.217,67.564 48.217,47.07 61.127,34.16 64,34.16
NetJ1_3: J1.3 R2.2 U1.1 | length 52
  Top Layer w0.254: R2.2 45.28,85.346 47.4,83.226 47.4,80 48.355,79.045 U1.1
  Bottom Layer w0.127: R2.2 46.3,86.98 46.3,73.3 48.3,71.3 69.03,71.3 J1.3
NetJ1_4: J1.4 U1.21 | length 6.4
  Top Layer w0.127: U1.21 65.498,77.045 69.003,73.54 J1.4
NetJ1_5: J1.5 U1.22 | length 6.7
  Top Layer w0.127: U1.22 66.133,78.01 66.8,78.01 J1.5
NetJ1_6: J1.6 R1.1 U1.18 | length 49.1
  Top Layer w0.127: U1.18@65.498,71.045 66.035,71.582 66.035,72.112 66.9,72.978 v2(66.9,74.2)
  Top Layer w0.254: R1.1 53.72,45 63,45 65,47 65,53 67.7,55.7 67.7,69.6 66.33,70.97 65.573,70.97 65.498,71.045 U1.18
  Bottom Layer w0.127: v2(66.9,74.2) 68.78,76.08 J1.6
NetK1_COM: "SOLENOID 2.2" K1.COM | length 21.4
  Top Layer w0.9: 7,77.54 16.46,77.54 22,72 K1.COM@22,67.9
NetK1_NC: "SOLENOID 2.3" K1.NC | length 12
  Bottom Layer w0.9: 7,75 8.8,75 K1.NC
NetK1_NO: "SOLENOID 2.1" K1.NO | length 23.1
  Top Layer w0.9: 7,80.08 18.858,80.08 20.398,78.54 24.44,78.54 K1.NO@28,82.1
NetK2_COM: "SOLENOID 1.2" K2.COM | length 21.9
  Top Layer w0.9: 7,57.46 17.54,57.46 22,53 K2.COM
NetK2_NC: "SOLENOID 1.3" K2.NC | length 12
  Bottom Layer w0.9: 7,54.92 8.82,54.92 K2.NC
NetK2_NO: "SOLENOID 1.1" K2.NO | length 24.7
  Top Layer w0.9: 7,60 7,62 9,64 26.1,64 K2.NO K2.NO@28.05,62.05
NetPOWER_IN_1: POWER_IN.1 U4.3 | length 12.9
  Top Layer w0.9: POWER_IN.1 7.4,18.14 7.787,18.14 7.927,18 12,18 16,22 U4.3
NetPOWER_IN_2: POWER_IN.2 U4.2 | length 11.6
  Top Layer w0.9: POWER_IN.2 16.5,16 U4.2
NetQ1_3: Q1.3 R5.1 | length 11.5
  Bottom Layer w0.254: Q1.3 42,60 R5.1
NetQ2_3: Q2.3 R6.1 | length 7.1
  Top Layer w0.254: Q2.3 39.29,76.29 R6.1@42,79
NetR3_2: R3.2 U1.3 | length 11.6
  Top Layer w0.254: R3.2 46.739,82.541 46.739,77.261 48.866,75.134 50.009,75.134 U1.3
NetR4_1: R4.1 U1.16 | length 23.5
  Top Layer w0.254: R4.1 64,48.72 64,53.8 67.1,56.9 67.1,65.5 66.028,66.572 65.571,66.572 U1.16
NetR5_2: R5.2 U1.5 | length 23.6
  Top Layer w0.254: R5.2 44.7,53 47.7,56 47.7,69.7 48.572,70.572 49.625,70.572 U1.5
NetR6_2: R6.2 U1.4 | length 9.8
  Top Layer w0.254: R6.2@42,69 44.6,69 48.645,73.045 U1.4
pads on no net: J1.7 J1.8 J1.9 U1.2 U1.9 U1.10 U1.11 U1.12 U1.13 U1.14 U1.17 U1.19 U1.20
copper on no net: | length 647.3
  Top Layer w0.254: 0.05,90.45 2.5,92.9 69.6,92.9 72.9,89.6 72.9,3.6 69.4,0.1 3.8,0.1 0.1,3.8 0.1,86.6 0.1,90 0.1,90.4
  Bottom Layer w0.254: 0.1,3.8 0.1,90.5 2.5,92.9 69.6,92.9 72.9,89.6 72.9,3.6 69.4,0.1 3.8,0.1 0.1,3.8
  other v1: 4,4 69,4 4,89 69,89

## Silkscreen, mask and mechanical layers (free items; w line width, h text height)
Top Overlay:
  drawing of 244 lines, arcs and shapes, not listed
  text "IO0" at 67.9,75.8 h0.5
  text "TX" at 68.2,74.6 h0.5
  text "RX" at 68.2,73.3 h0.5
  text "RST" at 67.8,72 h0.5
  text "GND" at 67.7,70.7 h0.5
  text "VCC" at 67.7,69.5 h0.5
  text "IO 12" at 53.254,33.254 h1.52
  text "IO 13" at 53.254,26.254 h1.52